# EAGLE board CPU (EAGLE 9.3.2)
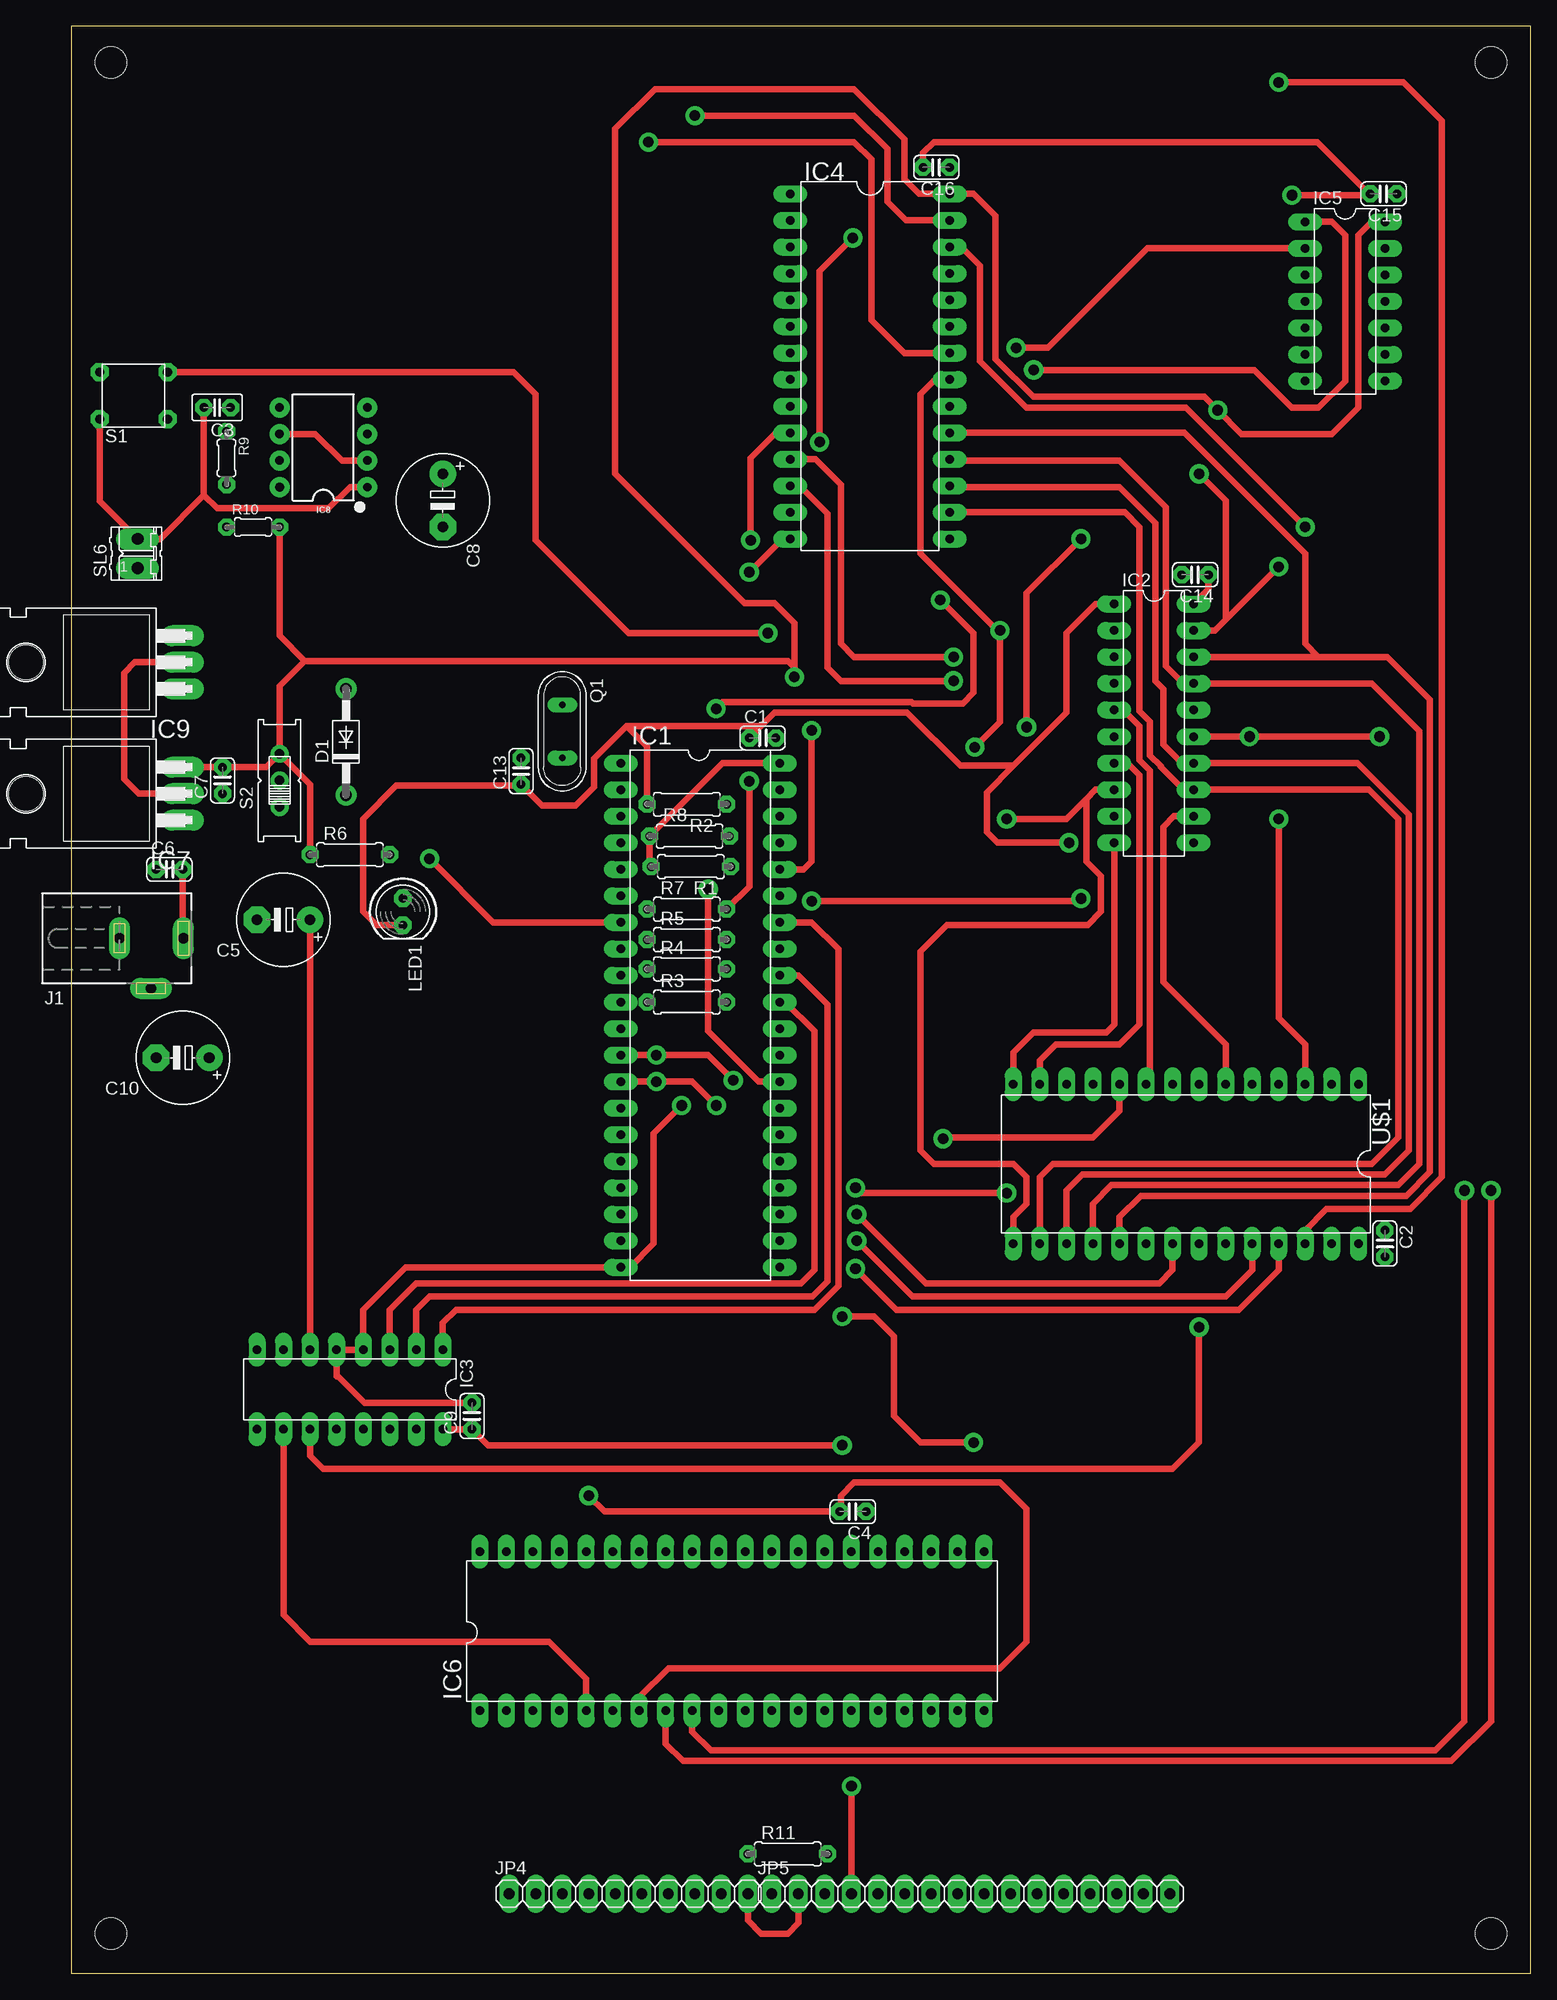
[diagram p0: board, top side]
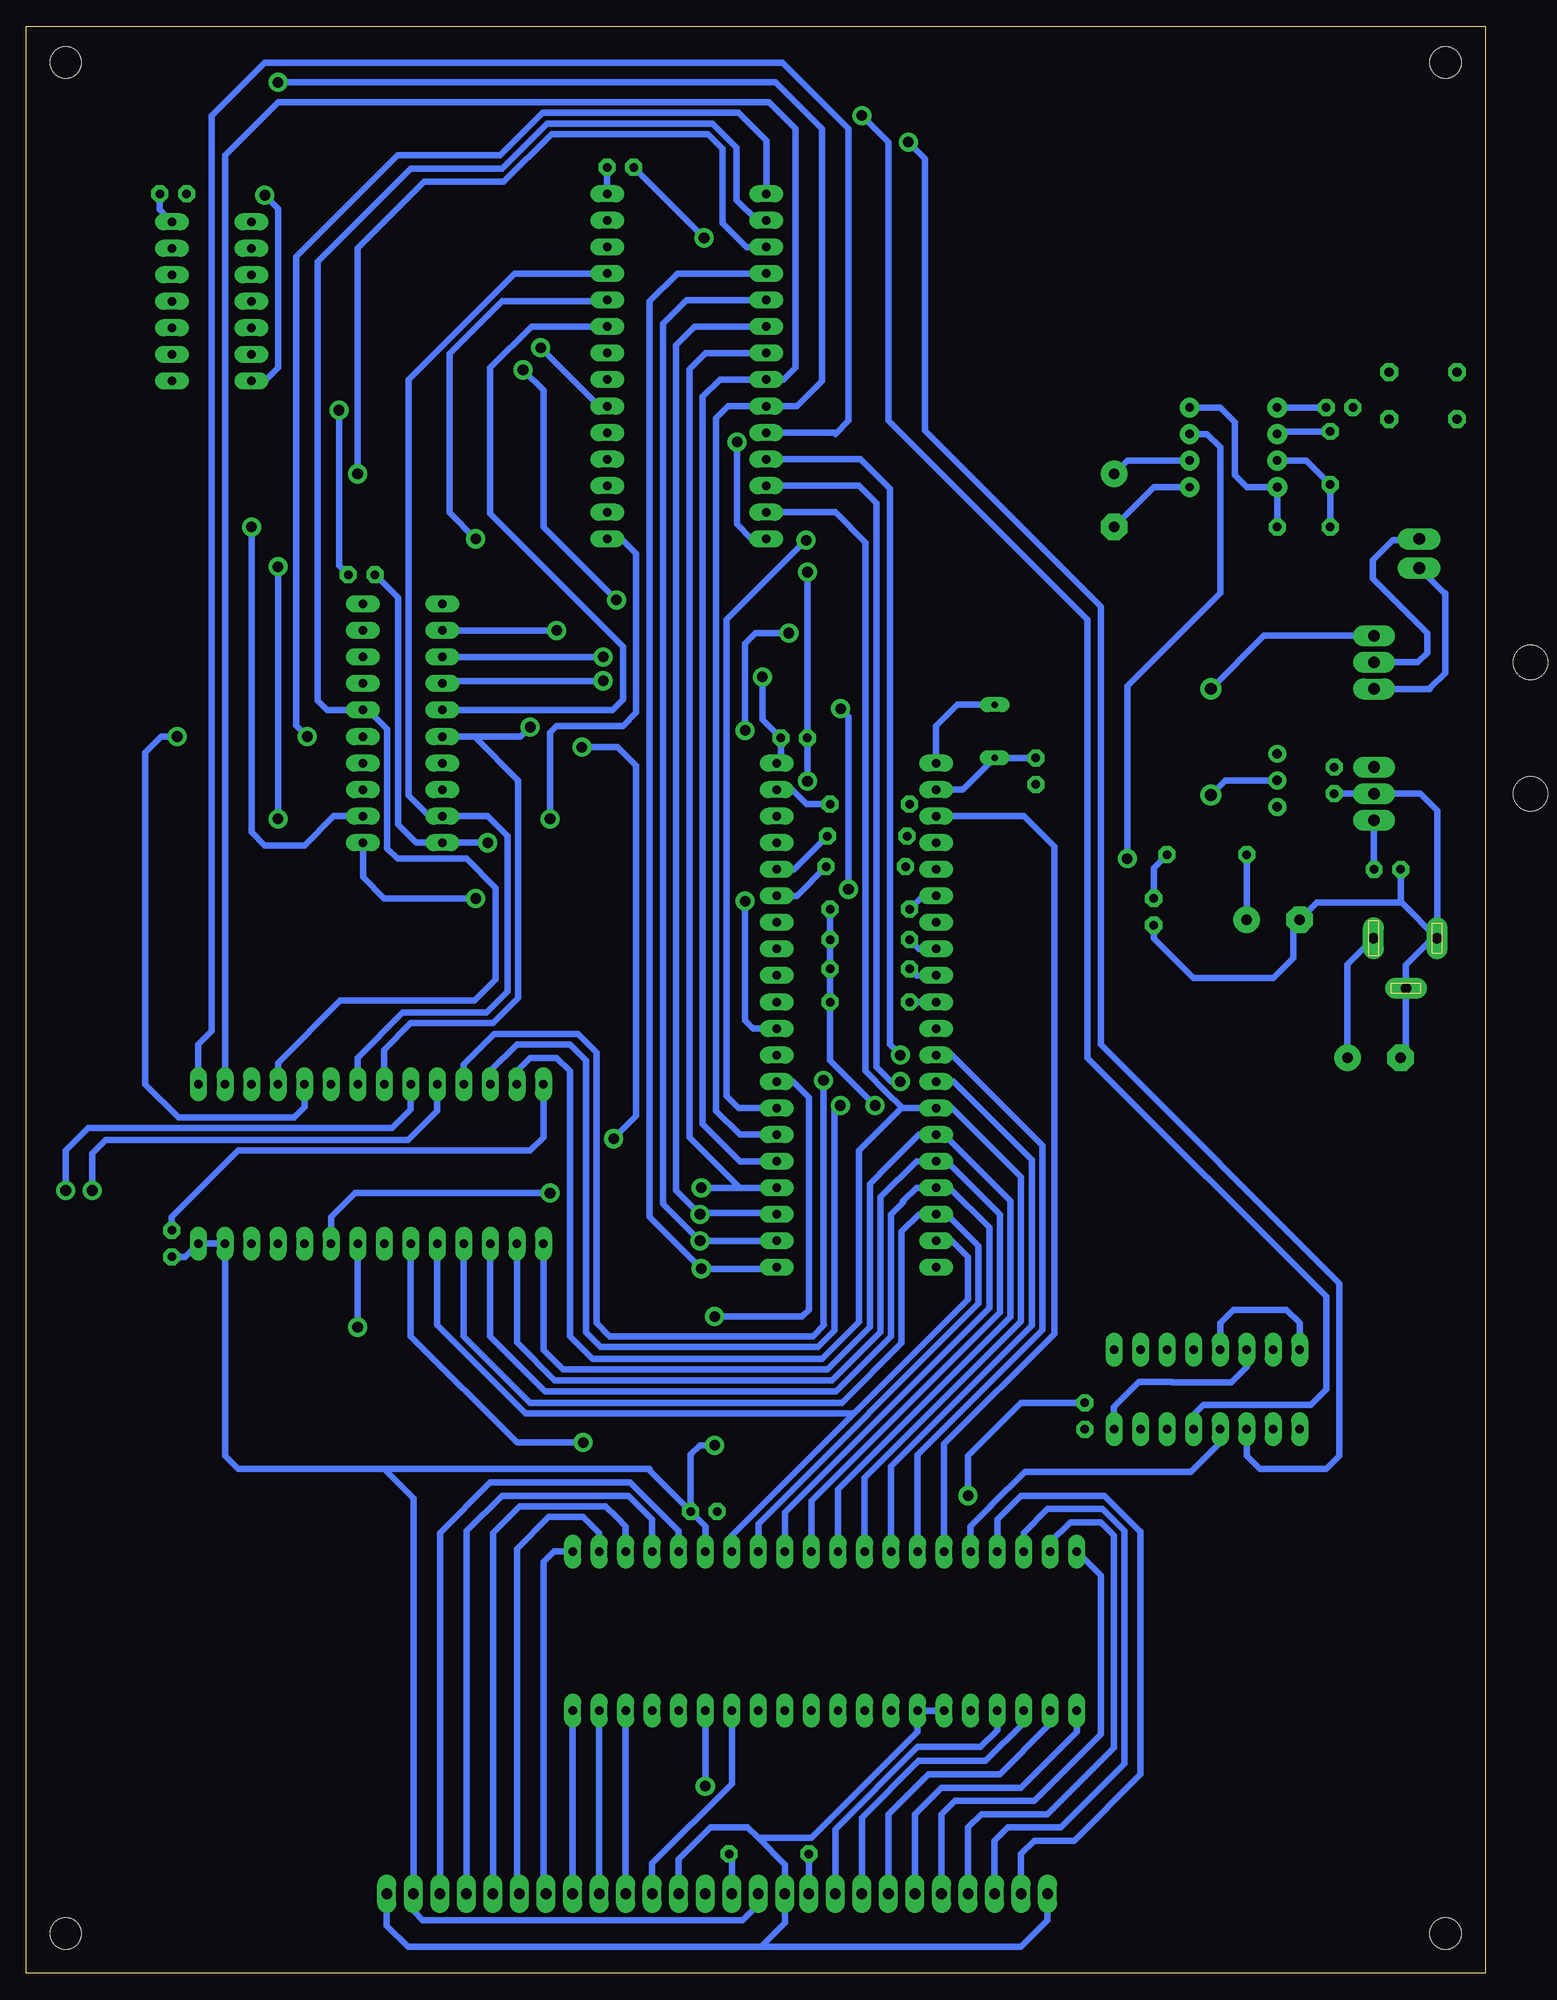
[diagram p1: board, bottom side, seen from below]

Size 139.68 x 186.36 mm. Coordinates in mm from the lower left corner, seen from the top.
Outline: 0,0 139.68,0 139.68,186.36 0,186.36 0,0
Copper layers (1*16): Top 0.035mm / dielectric 1.5mm / Bottom 0.035mm
Design rules "default *": minimum track width 16mil, minimum drill 0.35mm, track to track 16mil, track to pad 16mil, pad to pad 12mil, via to via 6mil, smd to smd 6mil, copper to edge 40mil, drill to drill 6mil, minimum pad ring 16mil, minimum via ring 16mil, stop-mask expansion 4mil, vias tented up to drill 0mil, thermal gap 10mil
Net classes: 0 default: width 0.406 mm, drill 0.254 mm, clearance 0.406 mm; 1 VCC: width 0.61 mm, drill 0.254 mm, clearance 0.254 mm to class 0, clearance 0.406 mm; 2 GND: width 0.61 mm, drill 0.254 mm, clearance 0.254 mm to class 0, clearance 0.406 mm to class 1, clearance 0.406 mm
Holes 3 mm at 3.81,182.88 135.89,182.88 135.89,3.81 3.81,3.81

## Footprints (pad centres in the part's own frame; a part is rotated, then mirrored left to right if it is on the bottom)
C025-024X044 = drill 0.813 octagon: 1 -1.27,0; 2 1.27,0
C2.5-2 = drill 0.813 pad 1.6 octagon: 1 -1.27,0; 2 1.27,0
E5-8,5 = drill 1.016 pad 2.54: + -2.54,0 | drill 1.016 pad 2.54 octagon: - 2.54,0
DO41-10 = drill 1.118 pad 1.93: A 5.08,0; C -5.08,0
DIL40 = drill 0.813 long: 1 -24.13,-7.62; 2 -21.59,-7.62; 3 -19.05,-7.62; 4 -16.51,-7.62; 5 -13.97,-7.62; 6 -11.43,-7.62; 7 -8.89,-7.62; 8 -6.35,-7.62; 9 -3.81,-7.62; 10 -1.27,-7.62; 11 1.27,-7.62; 12 3.81,-7.62; 13 6.35,-7.62; 14 8.89,-7.62; 15 11.43,-7.62; 16 13.97,-7.62; 17 16.51,-7.62; 18 19.05,-7.62; 19 21.59,-7.62; 20 24.13,-7.62; 21 24.13,7.62; 22 21.59,7.62; 23 19.05,7.62; 24 16.51,7.62; 25 13.97,7.62; 26 11.43,7.62; 27 8.89,7.62; 28 6.35,7.62; 29 3.81,7.62; 30 1.27,7.62; 31 -1.27,7.62; 32 -3.81,7.62; 33 -6.35,7.62; 34 -8.89,7.62; 35 -11.43,7.62; 36 -13.97,7.62; 37 -16.51,7.62; 38 -19.05,7.62; 39 -21.59,7.62; 40 -24.13,7.62
DIL20 = drill 0.813 long: 1 -11.43,-3.81; 2 -8.89,-3.81; 3 -6.35,-3.81; 4 -3.81,-3.81; 5 -1.27,-3.81; 6 1.27,-3.81; 7 3.81,-3.81; 8 6.35,-3.81; 9 8.89,-3.81; 10 11.43,-3.81; 11 11.43,3.81; 12 8.89,3.81; 13 6.35,3.81; 14 3.81,3.81; 15 1.27,3.81; 16 -1.27,3.81; 17 -3.81,3.81; 18 -6.35,3.81; 19 -8.89,3.81; 20 -11.43,3.81
DIL16 = drill 0.813 long: 1 -8.89,-3.81; 2 -6.35,-3.81; 3 -3.81,-3.81; 4 -1.27,-3.81; 5 1.27,-3.81; 6 3.81,-3.81; 7 6.35,-3.81; 8 8.89,-3.81; 9 8.89,3.81; 10 6.35,3.81; 11 3.81,3.81; 12 1.27,3.81; 13 -1.27,3.81; 14 -3.81,3.81; 15 -6.35,3.81; 16 -8.89,3.81
DIL28-6 = drill 0.813 long: 1 -16.51,-7.62; 2 -13.97,-7.62; 3 -11.43,-7.62; 4 -8.89,-7.62; 5 -6.35,-7.62; 6 -3.81,-7.62; 7 -1.27,-7.62; 8 1.27,-7.62; 9 3.81,-7.62; 10 6.35,-7.62; 11 8.89,-7.62; 12 11.43,-7.62; 13 13.97,-7.62; 14 16.51,-7.62; 15 16.51,7.62; 16 13.97,7.62; 17 11.43,7.62; 18 8.89,7.62; 19 6.35,7.62; 20 3.81,7.62; 21 1.27,7.62; 22 -1.27,7.62; 23 -3.81,7.62; 24 -6.35,7.62; 25 -8.89,7.62; 26 -11.43,7.62; 27 -13.97,7.62; 28 -16.51,7.62
DIL14 = drill 0.813 long: 1 -7.62,-3.81; 2 -5.08,-3.81; 3 -2.54,-3.81; 4 0,-3.81; 5 2.54,-3.81; 6 5.08,-3.81; 7 7.62,-3.81; 8 7.62,3.81; 9 5.08,3.81; 10 2.54,3.81; 11 0,3.81; 12 -2.54,3.81; 13 -5.08,3.81; 14 -7.62,3.81
TO220H = drill 1.118 long: 1 -2.54,-10.16; 2 0,-10.16; 3 2.54,-10.16 | hole 3.302: 0,4.826
DIP08-KIT = drill 0.813 pad 1.905: 1 -3.81,-4.191; 2 -1.27,-4.191; 3 1.27,-4.191; 4 3.81,-4.191; 5 3.81,4.191; 6 1.27,4.191; 7 -1.27,4.191 | drill 0.864 pad 1.905: 8 -3.81,4.191
DCJ0303 = drill 1 pad 2 long: 1 0,3.1; 2 4.8,0; 3 0,-3
1X10 = drill 1.016 long: 1 -11.43,0; 2 -8.89,0; 3 -6.35,0; 4 -3.81,0; 5 -1.27,0; 6 1.27,0; 7 3.81,0; 8 6.35,0; 9 8.89,0; 10 11.43,0
1X16 = drill 1.016 long: 1 -19.05,0; 2 -16.51,0; 3 -13.97,0; 4 -11.43,0; 5 -8.89,0; 6 -6.35,0; 7 -3.81,0; 8 -1.27,0; 9 1.27,0; 10 3.81,0; 11 6.35,0; 12 8.89,0; 13 11.43,0; 14 13.97,0; 15 16.51,0; 16 19.05,0
LED5MM = drill 0.813 pad 1.676 octagon: A -1.27,0; K 1.27,0
QS = drill 0.61 long: 1 -2.54,0; 2 2.54,0
0207/7 = drill 0.813 octagon: 1 -3.81,0; 2 3.81,0
0204/5 = drill 0.813 octagon: 1 -2.54,0; 2 2.54,0
B3F-10XX = drill 0.889 octagon: COM@1 -3.25,-2.25; COM@2 3.25,-2.25; NO@1 -3.25,2.25; NO@2 3.25,2.25
EG1218 = drill 0.9 pad 1.676: O -2.54,0; P 0,0; S 2.54,0
02P = drill 1.143 long: 1 -1.397,0; 2 1.397,0

## Placement (x,y rotation side)
C1  0.1uF  [C025-024X044]  66.17,118.24 0 top
C2  0.1uF  [C025-024X044]  125.73,69.85 270 top
C3  0.01uF  [C2.5-2]  13.97,149.86 180 top
C4  0.1uF  [C025-024X044]  74.8,44.2 180 top
C5  0.1uF  [E5-8,5]  20.32,100.84 180 top
C6  0.1uF  [C025-024X044]  9.4,105.66 0 top
C7  10uF  [C025-024X044]  14.48,114.17 90 top
C8  47uF  [E5-8,5]  35.56,140.97 270 top
C9  0.1uF  [C025-024X044]  38.35,53.34 90 top
C10  10uF  [E5-8,5]  10.67,87.63 180 top
C13  0.1uF  [C025-024X044]  43.05,115.06 90 top
C14  0.1uF  [C025-024X044]  107.57,133.86 180 top
C15  0.1uF  [C025-024X044]  125.6,170.31 180 top
C16  0.1uF  [C025-024X044]  82.8,172.85 180 top
D1  1N4004  [DO41-10]  26.29,117.86 90 top
IC1  8085  [DIL40]  60.2,91.69 270 top
IC2  74LS373N  [DIL20]  103.63,119.63 270 top
IC3  74LS138N  [DIL16]  26.67,55.88 180 top
IC4  CY62256LL-PC  [DIL28-6]  76.45,153.8 270 top
IC5  74LS04N  [DIL14]  121.92,160.02 270 top
IC6  8255  [DIL40]  63.25,32.77 0 top
IC7  7805T  [TO220H]  0.51,112.9 90 top
IC8  555  [DIP08-KIT]  24.13,146.05 90 top
IC9  7805T  [TO220H]  0.51,125.48 90 top
J1  12v adapter  [DCJ0303]  7.62,99.06 270 top
JP4  [1X10]  53.34,7.62 0 top
JP5  [1X16]  86.11,7.62 0 top
LED1  [LED5MM]  31.75,101.6 270 top
Q1  10MHz  [QS]  46.99,118.87 270 top
R1  10k  [0207/7]  59.31,105.92 180 top
R2  10k  [0207/7]  58.93,111.89 180 top
R3  10k  [0207/7]  58.93,92.96 0 top
R4  10k  [0207/7]  58.93,96.14 0 top
R5  10k  [0207/7]  58.93,98.93 0 top
R6  10k  [0207/7]  26.67,107.06 0 top
R7  10k  [0207/7]  58.93,101.85 0 top
R8  10k  [0207/7]  59.18,108.84 0 top
R9  1M  [0204/5]  14.86,145.03 270 top
R10  10K  [0204/5]  17.4,138.43 0 top
R11  10k  [0207/7]  68.58,11.43 0 top
S1  SPST4B3F-10XX  [B3F-10XX]  5.97,151 0 top
S2  [EG1218]  19.94,114.17 90 top
SL6  9V in  [02P]  6.35,135.89 90 top
U$1  AT28C256  [DIL28-6]  106.68,77.47 180 top

## Library data of the parts
C1 C2 C4 C6 C7 C9 C13-C16 = rcl; SPICEPREFIX: C
C3 = capacitor-wima
C5 C8 C10 R1-R8 R11 = rcl
D1 IC7 IC9 LED1 S2 = adafruit
IC1 = micro-intel; OC_FARNELL: unknown; OC_NEWARK: unknown
IC2 IC3 IC5 = 74xx-eu
IC4 = memory-sram
IC6 = micro-intel; MF: INTERSIL; MPN: IP82C55AZ; OC_FARNELL: 1562050; OC_NEWARK: 79K6939
IC8 = SparkFun-IC-Special-Function; PROD_ID: IC-09173; PROD_ID_ALT: IC-11930
J1 = con-jack; OC_FARNELL: unknown; OC_NEWARK: unknown
JP4 JP5 = pinhead
Q1 = special
R9 R10 = rcl; SPICEPREFIX: R
S1 = bt_electromech
SL6 = CEDT_JANUARY_2015_v5
U$1 = bt_memory

## Nets
A0: IC2.2 IC4.21 IC6.9 U$1.10
A1: IC2.5 IC4.23 IC6.8 U$1.9
A2: IC2.6 IC4.24 U$1.8
A3: IC2.9 IC4.25 U$1.7
A4: IC2.12 IC4.26 U$1.6
A5: IC2.15 IC4.1 U$1.5
A6: IC2.16 IC4.2 U$1.4
A7: IC2.19 IC4.3 U$1.3
A8: IC1.21 IC4.4 U$1.25
A9: IC1.22 IC4.5 U$1.24
A10: IC1.23 IC4.6 U$1.21
A11: IC1.24 IC4.7 U$1.23
A12: IC1.25 IC4.8 U$1.2
A13: IC1.26 IC4.9 U$1.26
A14: IC1.27 IC4.10 U$1.1
A15: IC1.28 IC5.1 U$1.20
CNT: JP5.3 R11.2
D0: IC1.12 IC2.3 IC4.11 IC6.34 U$1.11
D1: IC1.13 IC2.4 IC4.12 IC6.33 U$1.12
D2: IC1.14 IC2.7 IC4.13 IC6.32 U$1.13
D3: IC1.15 IC2.8 IC4.15 IC6.31 U$1.15
D4: IC1.16 IC2.13 IC4.16 IC6.30 U$1.16
D5: IC1.17 IC2.14 IC4.17 IC6.29 U$1.17
D6: IC1.18 IC2.17 IC4.18 IC6.28 U$1.18
D7: IC1.19 IC2.18 IC4.19 IC6.27 U$1.19
EN: IC6.14 JP5.6
ENC0: IC6.37 JP4.2
ENC1: IC6.38 JP4.3
ENC2: IC6.39 JP4.4
ENC3: IC6.40 JP4.5
ENC4: IC6.1 JP4.6
ENC5: IC6.2 JP4.7
ENC6: IC6.3 JP4.8
ENC7: IC6.4 JP4.9
GND [GND]: C1.1 C2.1 C3.2 C4.2 C5.- C6.1 C7.1 C8.- C9.2 C10.- C13.1 C14.2 C15.2 C16.2 IC1.20 IC2.1 IC2.10 IC3.4 IC3.5 IC3.8 IC4.14 IC5.7 IC6.6 IC6.7 IC7.2 IC8.1 IC9.2 J1.2 J1.3 JP4.1 JP5.1 JP5.5 JP5.16 LED1.K R2.2 R3.2 R4.2 R5.2 R7.2 S1.COM@1 SL6.2 U$1.14
I/OR: IC3.10 IC6.5
I/OW: IC3.12 IC6.36
LCD0: IC6.18 JP5.7
LCD1: IC6.19 JP5.8
LCD2: IC6.20 JP5.9
LCD3: IC6.21 JP5.10
LCD4: IC6.22 JP5.11
LCD5: IC6.23 JP5.12
LCD6: IC6.24 JP5.13
LCD7: IC6.25 JP5.14
MEMR: IC3.11 IC4.22 U$1.22
MEMW: IC3.13 IC4.27
N$1: C8.+ IC8.2 IC8.6 R9.1
N$2 [VCC]: C6.2 C10.+ IC7.1 J1.1
N$3: IC1.1 Q1.1
N$4: C13.2 IC1.2 Q1.2
N$5: IC1.35 R1.1
N$6: IC1.39 R2.1
N$7: IC8.7 R9.2 R10.1
N$8: IC1.10 R3.1
N$9: IC1.30 IC2.11
N$10: IC1.9 R4.1
N$11: IC1.8 R5.1
N$12: C3.1 IC8.5
N$13: IC1.6 R7.1
N$14 [VCC]: IC9.1 SL6.1
N$15: IC1.36 R8.2 S1.NO@2
N$16 [VCC]: D1.A IC9.3
N$17 [VCC]: D1.C S2.P
N$18: LED1.A R6.2
N$19: IC4.20 IC5.2
N$25: IC1.34 IC3.1
N$26: IC1.32 IC3.2
N$27: IC1.31 IC3.3
RES_OUT: IC1.3 IC6.35
RS: IC6.15 JP5.4
RST7_5: IC1.7 IC8.3
VCC [VCC]: C1.2 C2.2 C4.1 C5.+ C7.2 C9.1 C14.1 C15.1 C16.1 IC1.40 IC2.20 IC3.6 IC3.16 IC4.28 IC5.14 IC6.26 IC7.3 IC8.4 IC8.8 JP4.10 JP5.2 JP5.15 R1.2 R6.1 R8.1 R10.2 R11.1 S2.S U$1.27 U$1.28

## Tracks (layer width: path | path; a pad name or v marks a point on that pad's centre or on a via)
A0  (via drill 1.02)
  Top 0.61: IC4.21 82.68,152.53 81.28,151.13 81.28,135.89 88.65,128.52 v88.9,128.52 88.9,119.76 v86.49,117.35 | IC6.9 59.44,23.11 61.21,21.34 130.56,21.34 133.35,24.13 v133.35,74.93 | v83.44,79.88 83.57,80.01 97.79,80.01 100.33,82.55 U$1.10
  Bottom 0.61: v83.44,79.88 81.28,82.04 81.28,115.57 83.06,117.35 v86.49,117.35 | U$1.10 100.33,82.55 103.12,79.76 132.08,79.76 133.35,78.49 v133.35,74.93 | IC2.2 v88.9,128.52
A1  (via drill 1.02)
  Top 0.61: IC6.8 56.9,21.97 58.55,20.32 132.08,20.32 135.89,24.13 v135.89,74.93 | U$1.9 103.25,85.47 103.25,115.1 102.23,116.12 102.23,119.38 100.71,120.9 IC2.5
  Bottom 0.61: IC2.5 83.57,120.9 82.55,121.92 82.55,127 95.25,139.7 95.25,153.67 91.31,157.61 IC4.23 | U$1.9 102.87,82.68 104.65,80.9 133.73,80.9 135.89,78.74 v135.89,74.93
A2  (via drill 1.02)
  Top 0.61: v96.65,137.29 91.44,132.08 v91.44,119.28
  Bottom 0.61: IC4.24 84.2,160.02 94.15,160.02 99.14,155.02 99.14,139.78 v96.65,137.29 | U$1.8 105.41,88.39 102.87,90.93 95,90.93 92.58,93.34 92.58,114.17 96.77,118.36 | 96.77,118.36 IC2.6 | v91.44,119.28 92.35,118.36 96.77,118.36
A3
  Bottom 0.61: IC4.25 92.92,162.69 103.07,152.53 103.07,112.72 101.09,110.74 IC2.9 95.5,110.74 93.6,108.84 93.6,93.98 95.63,91.95 103.63,91.95 107.95,87.63 U$1.7
A4  (via drill 1.02)
  Top 0.61: v118.11,138.43 106.68,149.86 91.44,149.86 87,154.31 87,163.45 85.22,165.23 IC4.26 | U$1.6 110.49,88.9 104.52,94.87 104.52,109.73 105.54,110.74 IC2.12
  Bottom 0.61: IC2.12 110.24,110.74 113.03,107.95 116.84,107.95 118.11,109.22 v118.11,138.43
A5  (via drill 1.02)
  Top 0.61: IC2.15 v112.78,118.36 v125.22,118.36
  Bottom 0.61: U$1.5 113.03,82.93 114.05,81.92 125.09,81.92 128.27,85.09 128.27,116.84 126.75,118.36 v125.22,118.36 | v112.78,118.36 113.83,119.42 113.83,164.3 104.14,173.99 94.31,173.99 90.25,178.05 71.5,178.05 68.83,175.39 IC4.1
A6
  Bottom 0.61: U$1.4 115.57,87.12 109.6,93.09 96.77,93.09 94.74,95.12 94.74,103.89 97.54,106.68 104.14,106.68 105.1,107.64 105.1,119.08 106.93,120.9 IC2.16 110.87,120.9 111.76,121.79 111.76,163.83 102.87,172.72 94.15,172.72 89.83,177.04 74,177.04 71.67,174.71 71.67,169.72 69.72,167.77 IC4.2
A7  (via drill 1.02)
  Top 0.61: v115.57,110.49 115.57,91.44 118.11,88.9 U$1.3 | IC2.19 109.47,128.52 110.49,129.54 | 110.49,129.54 v115.57,134.62 | v107.95,143.51 110.49,140.97 110.49,129.54
  Bottom 0.61: IC4.3 70.74,165.23 73.03,167.51 73.03,174.62 74.42,176.02 89.41,176.02 93.98,171.45 101.6,171.45 107.95,165.1 v107.95,143.51 | v115.57,110.49 v115.57,134.62
A8  (via drill 1.02)
  Top 0.61: U$1.25 115.57,67.31 111.76,63.5 78.99,63.5 v75.06,67.44
  Bottom 0.61: IC1.21 67.94,67.44 v75.06,67.44 80.01,72.39 80.01,160.02 77.34,162.69 IC4.4
A9  (via drill 1.02)
  Top 0.61: U$1.24 113.03,67.31 110.49,64.77 80.52,64.77 v75.18,70.1
  Bottom 0.61: IC1.22 v75.18,70.1 78.74,73.66 78.74,157.86 76.45,160.15 IC4.5
A10  (via drill 1.02)
  Top 0.61: U$1.21 105.41,67.31 104.14,66.04 81.79,66.04 v75.18,72.64
  Bottom 0.61: IC1.23 67.94,72.77 75.06,72.77 v75.18,72.64 77.47,74.93 77.47,155.83 75.69,157.61 IC4.6
A11  (via drill 1.02)
  Top 0.61: v89.53,74.68 75.56,74.68 v75.06,75.18
  Bottom 0.61: IC4.7 74.68,155.07 76.2,153.54 76.2,80.01 71.37,75.18 | U$1.23 110.49,72.39 108.2,74.68 v89.53,74.68 | 71.37,75.18 IC1.24 | 71.37,75.18 v75.06,75.18
A12
  Bottom 0.61: IC1.25 71.37,77.72 74.93,81.28 74.93,150.88 73.28,152.53 IC4.8 67.18,152.53 66.04,153.67 66.04,176.53 68.58,179.07 115.57,179.07 120.65,173.99 U$1.2
A13  (via drill 1.02)
  Top 0.61: U$1.26 118.11,71.12 120.14,73.15 128.14,73.15 131.19,76.2 131.19,177.29 127.51,180.97 v115.57,180.97
  Bottom 0.61: IC1.26 71.37,80.26 73.66,82.55 73.66,148.84 72.52,149.99 IC4.9 65.91,149.99 63.5,152.4 63.5,176.53 67.94,180.97 v115.57,180.97
A14  (via drill 1.02)
  Top 0.61: v65.02,137.16 65.02,145.03 67.44,147.45 IC4.10
  Bottom 0.61: IC1.27 71.5,82.8 72.64,83.95 72.64,129.54 v65.02,137.16 | IC4.10 62.36,147.45 62.23,147.32 60.96,148.59 60.96,176.53 67.31,182.88 116.84,182.88 121.92,177.8 121.92,90.17 123.19,88.9 U$1.1
A15  (via drill 1.02)
  Top 0.61: v86.36,50.8 81.28,50.8 78.74,53.34 78.74,60.96 76.84,62.87 v73.79,62.87 | IC1.28 65.79,85.34 60.96,90.17 v60.96,103.74 v60.97,103.75 | IC5.1 120.65,167.64 121.92,166.37 121.92,152.4 119.38,149.86 116.84,149.86 113.25,153.45 v92.11,153.45 | v83.19,131.44 86.36,128.27 86.36,122.56 85.34,121.54 80.56,121.54 80.43,121.67 62.36,121.67 v61.72,121.03
  Bottom 0.61: v86.36,50.8 92.71,50.8 102.87,60.96 U$1.20 | IC1.28 66.29,85.34 64.77,83.82 64.77,63.5 65.41,62.87 v73.79,62.87 | v92.11,153.45 90.17,151.51 90.17,138.43 v83.19,131.44 | v61.72,121.03 60.97,120.28 v60.97,103.75
CNT
  Bottom 0.61: JP5.3 72.14,11.18 R11.2
D0  (via drill 1.02)
  Top 0.61: IC4.11 71.25,144.91 73.66,142.49 73.66,127.25 74.93,125.98 v84.45,125.98 | IC1.12 v56.01,87.88 60.96,87.88 63.37,85.48 v63.37,85.47
  Bottom 0.61: IC6.34 54.36,49.63 42.42,61.57 42.42,79.25 51.05,87.88 IC1.12 | IC4.11 59.82,144.91 57.02,142.11 57.02,88.9 v56.01,87.88 | IC2.3 v84.45,125.98 | U$1.11 97.79,87 94.87,89.92 86.87,89.92 85.09,88.14 85.09,62.23 83.82,60.96 64.39,60.96 63.31,62.04 63.37,62.1 63.37,83.82 63.37,83.83 v63.37,85.47
D1  (via drill 1.02)
  Top 0.61: IC4.12 69.72,142.37 72.39,139.7 72.39,124.97 73.66,123.7 v84.45,123.7 | IC1.13 v56.01,85.34 59.44,85.34 61.72,83.06 v61.75,83.06
  Bottom 0.61: IC6.33 56.9,48.51 55.88,49.53 55.88,49.55 43.43,61.99 43.43,77.85 50.93,85.34 IC1.13 | IC4.12 59.94,142.37 58.29,140.72 58.29,86.74 56.9,85.34 v56.01,85.34 | IC2.4 99.57,123.7 v84.45,123.7 | U$1.12 95.25,86.36 92.71,88.9 87.63,88.9 86.11,87.38 86.11,61.34 84.71,59.94 63.88,59.94 62.29,61.53 62.29,82.55 62.26,82.55 v61.75,83.06
D2
  Top 0.61: U$1.13 92.71,87.38 94.23,88.9 100.33,88.9 102.23,90.81 102.23,114.68 101.09,115.82 IC2.7
  Bottom 0.61: IC6.32 59.44,47.43 44.45,62.41 44.45,76.2 51.05,82.8 IC1.14 55.88,82.8 | IC4.13 62.23,139.83 59.34,136.94 59.34,86.36 59.31,86.33 59.31,86.32 57.32,84.33 57.31,84.33 55.88,82.9 55.88,82.8 | U$1.13 92.71,86.36 91.44,87.63 88.9,87.63 87.63,86.36 87.63,60.96 85.47,58.8 63.5,58.8 59.94,62.36 59.94,78.74 55.88,82.8
D3  (via drill 1.02)
  Top 0.61: U$1.15 90.17,72.39 91.44,73.66 91.44,76.2 90.17,77.47 82.55,77.47 81.28,78.74 81.28,97.79 83.82,100.33 97.28,100.33 98.55,101.6 98.55,105.03 97.16,106.43 97.16,112.39 | IC2.8 98.04,113.28 97.16,112.39 | 97.16,112.39 95.25,110.49 v89.53,110.49
  Bottom 0.61: IC6.31 61.98,46.32 45.47,62.83 45.47,73.91 51.82,80.26 IC1.15 54.23,80.26 57.09,77.41 58.93,75.56 58.93,61.85 62.99,57.78 88.26,57.78 90.17,59.69 U$1.15 | IC4.15 82.68,137.29 81.28,135.89 81.28,120.65 82.55,119.38 88.9,119.38 89.53,118.75 v89.53,110.49
D4
  Top 0.61: IC4.16 100.84,139.83 102.23,138.43 102.23,120.82 103.25,119.8 103.25,116.54 104.27,115.52 104.27,115.44 106.43,113.28 IC2.13 124.21,113.28 127,110.49 127,80.01 124.46,77.47 93.98,77.47 92.71,76.2 U$1.16
  Bottom 0.61: IC6.30 64.52,45.22 46.48,63.25 46.48,72.64 51.56,77.72 IC1.16 54.48,77.72 57.91,74.3 57.91,61.39 62.53,56.77 89.11,56.77 92.71,60.37 U$1.16
D5
  Top 0.61: IC4.17 84.2,142.24 100.33,142.24 103.76,138.81 103.76,123.7 104.52,122.94 104.52,117.6 106.3,115.82 IC2.14 123.1,115.82 128.02,110.91 128.02,78.74 125.73,76.45 96.77,76.45 95.25,74.93 U$1.17
  Bottom 0.61: IC6.29 67.06,44.12 47.5,63.67 47.5,71.37 51.31,75.18 IC1.17 54.48,75.18 55.75,73.91 55.75,73.79 56.9,72.64 56.9,60.96 57.14,60.71 57.15,60.71 62.15,55.71 90,55.71 95.25,60.96 U$1.17
D6
  Top 0.61: IC4.18 84.2,144.78 100.33,144.78 104.77,140.34 104.77,125.09 106.43,123.44 IC2.17 124.46,123.44 129.03,118.87 129.03,77.47 127,75.44 99.57,75.44 97.79,73.66 U$1.18
  Bottom 0.61: IC6.28 69.6,43.01 48.51,64.09 48.51,69.6 51.56,72.64 IC1.18 54.23,72.64 55.88,70.99 55.88,60.33 61.59,54.61 91.44,54.61 97.79,60.96 U$1.18
D7
  Top 0.61: IC4.19 106.55,147.45 118.11,135.89 118.11,127.25 119.38,125.98 | IC2.18 119.38,125.98 | 119.38,125.98 125.98,125.98 130.05,121.92 130.05,76.71 127.76,74.42 102.36,74.42 100.33,72.39 U$1.19
  Bottom 0.61: IC6.27 72.14,41.91 60.45,53.59 | 60.45,53.59 49.53,64.52 49.53,68.58 51.05,70.1 IC1.19 | 60.45,53.59 91.86,53.59 100.33,62.06 U$1.19
EN
  Bottom 0.61: JP5.6 79.76,10.54 72.14,18.16 72.14,19.05 72.14,20.07 IC6.14
ENC0
  Bottom 0.61: JP4.2 44.45,11.43 43.18,12.7 39.37,12.7 33.02,19.05 33.02,42.29 33.07,42.29 36.5,45.72 44.45,45.72 46.74,43.43 IC6.37
ENC1
  Bottom 0.61: JP4.3 46.99,12.7 45.72,13.97 40.64,13.97 34.54,20.07 34.54,42.33 36.66,44.45 41.91,44.45 44.2,42.16 IC6.38
ENC2
  Bottom 0.61: JP4.4 49.53,13.97 48.26,15.24 41.91,15.24 35.56,21.59 35.56,41.91 36.83,43.18 39.75,43.18 41.66,41.27 IC6.39
ENC3
  Bottom 0.61: JP4.5 52.07,15.24 50.8,16.51 43.18,16.51 36.83,22.86 36.83,38.1 IC6.40
ENC4
  Bottom 0.61: IC6.1 39.12,23.11 44.45,17.78 52.07,17.78 54.61,15.24 JP4.6
ENC5
  Bottom 0.61: IC6.2 41.91,24.89 41.91,23.62 46.48,19.05 53.34,19.05 57.15,15.24 JP4.7
ENC6
  Bottom 0.61: IC6.3 44.2,24 47.88,20.32 54.28,20.32 59.69,14.91 JP4.8
ENC7
  Bottom 0.61: IC6.4 46.74,23.28 48.34,21.67 54.36,21.67 62.23,13.8 JP4.9
GND  (via drill 1.02)
  Top 0.61: U$1.14 90.17,88.14 92.07,90.04 99.06,90.04 99.82,90.81 IC2.10 | 90.17,115.57 85.09,115.57 80.01,120.65 67.31,120.65 66.04,119.38 | IC2.1 98.04,131.06 95.25,128.27 95.25,120.65 90.17,115.57 | IC4.14 68.07,137.29 v64.9,134.11 | C15.2 124.33,170.18 | C16.2 81.53,174.24 82.55,175.26 119.25,175.26 124.33,170.18 | R7.2 64.9,104.01 v64.9,114.1 | v116.84,170.18 124.33,170.18 | IC7.2 6.48,112.9 5.08,114.3 5.08,124.46 6.1,125.48 IC9.2 | 12.7,141.48 13.97,140.21 24.64,140.21 26.67,142.24 IC8.1 | C3.2 12.7,141.48 | C9.2 28.07,54.61 25.53,57.15 25.4,57.15 IC3.5 IC3.4 27.94,63.5 32,67.56 IC1.20 53.47,67.56 55.75,69.85 55.75,80.39 v58.42,83.06 | 53.17,119.38 50.04,116.25 50.04,113.54 48.26,111.76 45.09,111.76 C13.1 42.93,113.67 31.12,113.67 27.94,110.49 27.94,101.6 29.21,100.33 LED1.K | v49.53,45.72 51.05,44.2 C4.2 73.66,44.32 73.66,45.72 74.93,46.99 88.9,46.99 91.44,44.45 91.44,31.75 88.9,29.21 57.15,29.21 54.36,26.42 IC6.7 | v71.63,146.56 71.63,162.92 v74.8,166.09 | 90.17,115.57 87.63,113.03 87.63,109.22 88.65,108.2 v95.5,108.2 | 12.7,141.48 8.51,137.29 SL6.2 2.72,140.92 S1.COM@1 | C1.1 66.04,119.38 | 66.04,119.38 53.17,119.38 | R2.2 55.12,117.43 53.17,119.38
  Bottom 0.61: JP4.1 41.91,5.08 44.45,2.54 69.34,2.54 | JP5.5 77.22,10.92 74.17,13.97 70.61,13.97 69.6,12.95 | R7.2 R5.2 R4.2 R3.2 62.74,87.38 v58.42,83.06 | C2.1 125.73,72.39 119.38,78.74 91.44,78.74 90.17,80.01 U$1.14 | IC5.7 116.84,152.4 115.57,153.67 115.57,168.91 v116.84,170.18 | SL6.2 6.48,137.16 8.89,137.16 10.79,135.25 10.79,133.48 5.59,128.27 5.59,126.36 6.48,125.48 IC9.2 | C10.- 7.62,88.14 J1.2 7.62,96.52 5.08,99.06 J1.3 | J1.3 8.02,102.47 | 8.02,102.47 8.13,102.57 C6.1 | J1.3 4.62,111.3 6.22,112.9 IC7.2 C7.1 | IC8.1 31.75,142.24 C8.- | 8.02,102.47 16.15,102.47 C5.- 18.41,100.2 18.41,97.16 20.32,95.25 27.94,95.25 31.75,99.06 LED1.K | IC3.8 17.78,62.23 19.05,63.5 24.13,63.5 25.4,62.23 IC3.5 | v49.53,45.72 49.53,49.53 44.45,54.61 C9.2 | 69.34,2.54 67.06,4.83 JP5.1 67.06,10.41 69.6,12.95 | JP5.16 105.16,4.57 103.12,2.54 69.34,2.54 | IC6.6 IC6.7 54.36,23.11 64.52,12.95 69.6,12.95 | C16.2 74.8,166.12 v74.8,166.09 | v71.63,146.56 71.63,138.68 70.23,137.29 IC4.14 | C14.2 104.09,131.65 104.09,109.93 102.36,108.2 IC2.10 v95.5,108.2 | v64.9,134.11 C1.1 v64.9,114.1
I/OR
  Top 0.61: IC6.5 49.28,28.19 45.72,31.75 22.86,31.75 20.32,34.29 IC3.10
I/OW
  Bottom 0.61: IC6.36 49.28,42.8 47.32,44.75 47.32,44.77 44.09,48.01 28.19,48.01 25.4,50.8 IC3.12
LCD0
  Bottom 0.61: JP5.7 IC6.18
LCD1
  Bottom 0.61: JP5.8 IC6.19
LCD2
  Bottom 0.61: JP5.9 IC6.20
LCD3
  Bottom 0.61: IC6.21 89.15,40.39 90.17,39.37 90.17,7.87 JP5.10
LCD4
  Bottom 0.61: JP5.11 92.71,7.87 92.71,40.64 89.66,43.69 86.36,43.69 84.84,42.16 IC6.22
LCD5
  Bottom 0.61: JP5.12 95,42.16 92.46,44.7 84.2,44.7 83.19,43.69 82.3,42.8 IC6.23
LCD6
  Bottom 0.61: JP5.13 97.54,42.33 94.15,45.72 82.04,45.72 79.76,43.43 IC6.24
LCD7
  Bottom 0.61: JP5.14 100.08,42.16 95.25,46.99 81.88,46.99 77.22,42.33 IC6.25
MEMR  (via drill 1.02)
  Top 0.61: v107.95,61.85 107.95,50.8 105.41,48.26 24.13,48.26 22.86,49.53 IC3.11 | IC4.22 79.76,155.07 77.47,157.35 76.58,158.24 76.58,173.61 74.93,175.26 v55.24,175.26
  Bottom 0.61: v107.95,61.85 U$1.22 | IC3.11 22.86,49.53 21.59,48.26 15.24,48.26 13.97,49.53 13.97,66.04 36.83,88.9 36.83,130.81 53.66,147.64 53.66,173.67 v55.24,175.26
MEMW  (via drill 1.02)
  Top 0.61: v59.69,177.8 74.93,177.8 78.1,174.62 78.1,169.54 79.88,167.77 IC4.27
  Bottom 0.61: IC3.13 27.94,53.47 27,54.41 16.71,54.41 15.24,55.88 15.24,64.77 38.1,87.63 38.1,129.54 57.15,148.59 57.15,175.26 v59.69,177.8
N$1
  Top 0.61: IC8.2 25.91,144.78 23.37,147.32 IC8.6
  Bottom 0.61: IC8.6 19.68,147.57 R9.1 | C8.+ 34.29,144.78 IC8.2
N$2
  Top 0.61: C6.2 10.67,99.11 J1.1
  Bottom 0.61: J1.1 13.21,96.57 C10.+ | IC7.1 C6.2
N$3
  Bottom 0.61: IC1.1 52.58,119.38 50.55,121.41 Q1.1
N$4
  Bottom 0.61: IC1.2 50.04,113.28 Q1.2 C13.2
N$5
  Bottom 0.61: R1.1 65.91,103.12 IC1.35
N$6
  Bottom 0.61: IC1.39 66.38,113.28 64.99,111.89 R2.1
N$7
  Bottom 0.61: R10.1 R9.2 17.14,144.78 IC8.7
N$8
  Bottom 0.61: IC1.10 R3.1
N$9  (via drill 1.02)
  Top 0.61: v96.65,102.87 96.39,102.62 v70.87,102.62
  Bottom 0.61: v96.65,102.87 105.41,102.87 107.44,104.9 IC2.11 | v70.87,102.62 70.87,91.19 70.1,90.42 IC1.30
N$10
  Bottom 0.61: IC1.9 54.48,95.5 R4.1
N$11
  Bottom 0.61: IC1.8 54.23,98.04 R5.1
N$12
  Bottom 0.61: C3.1 IC8.5
N$13
  Bottom 0.61: IC1.6 53.85,103.12 R7.1
N$14
  Bottom 0.61: SL6.1 3.94,132.08 3.86,132.08 3.86,124.46 5.33,122.99 5.33,122.94 IC9.1
N$15  (via drill 1.02)
  Top 0.61: IC1.36 70.1,105.66 70.87,106.43 v70.87,118.95 | v66.67,128.27 53.34,128.27 44.45,137.16 44.45,151.13 42.33,153.25 S1.NO@2
  Bottom 0.61: R8.2 66.17,105.66 IC1.36 | v66.67,128.27 69.85,128.27 70.87,127.25 v70.87,118.95
N$16
  Bottom 0.61: IC9.3 21.21,128.02 D1.A
N$17
  Bottom 0.61: S2.P 24.89,114.17 D1.C
N$18
  Bottom 0.61: R6.2 31.75,105.79 LED1.A
N$19  (via drill 1.02)
  Top 0.61: IC5.2 103,165.1 93.47,155.57 v90.42,155.57
  Bottom 0.61: v90.42,155.57 84.84,149.99 IC4.20
N$25
  Top 0.61: IC3.1 35.56,62.23 36.83,63.5 71.12,63.5 73.43,65.81 73.43,98.02 70.87,100.58 IC1.34
N$26
  Top 0.61: IC3.2 33.02,63.5 34.29,64.77 70.95,64.77 72.39,66.21 72.39,92.71 69.6,95.5 IC1.32
N$27
  Top 0.61: IC1.31 68.33,92.96 71.12,90.17 71.12,67.31 69.85,66.04 33.02,66.04 30.48,63.5 IC3.3
RES_OUT
  Bottom 0.61: IC6.35 51.82,50.67 41.27,61.21 41.27,107.82 44.2,110.74 IC1.3
RS  (via drill 1.02)
  Top 0.61: v74.68,17.91 JP5.4
  Bottom 0.61: IC6.15 74.68,17.78 74.68,17.79 v74.68,17.91
RST7_5  (via drill 1.02)
  Top 0.61: v34.29,106.68 40.39,100.58 IC1.7
  Bottom 0.61: IC8.3 26.67,147.32 25.4,146.05 25.4,132.08 34.29,123.19 v34.29,106.68
VCC  (via drill 1.02)
  Top 0.61: IC2.20 108.84,132.46 C14.1 | R1.2 55.37,106.05 R8.1 62.36,115.82 IC1.40 | 22.35,125.6 68.58,125.6 69.22,124.97 v69.22,124.08 69.22,129.22 67.31,131.13 64.45,131.13 52.07,143.51 52.07,176.53 55.88,180.34 74.93,180.34 79.76,175.51 79.76,171.7 81.15,170.31 IC4.28 86.36,170.31 88.45,168.21 88.45,154.5 92.07,150.88 108.46,150.88 v109.73,149.61 112.01,147.32 120.65,147.32 123.19,149.86 123.19,166.37 124.46,167.64 IC5.14 | S2.S 19.94,123.19 22.35,125.6 | IC7.3 C7.2 18.67,115.44 S2.S | R6.1 22.86,113.79 S2.S | IC3.6 C5.+ | v73.79,50.55 39.88,50.55 C9.1 IC3.16 | JP4.10 64.77,5.08 66.04,3.81 68.58,3.81 69.6,4.83 JP5.2 | R10.2 19.94,128.02 22.35,125.6
  Bottom 0.61: R11.1 JP4.10 | JP5.2 69.6,6.6 71.12,5.08 101.73,5.08 102.62,5.97 JP5.15 102.62,45.47 105.41,48.26 | C4.1 74.68,42.8 IC6.26 | IC1.40 67.44,116.2 C1.2 69.22,120.02 v69.22,124.08 | C2.2 124.46,68.58 U$1.28 U$1.27 120.65,49.53 119.38,48.26 105.41,48.26 | C16.1 IC4.28 | C4.1 80.01,48.13 80.01,48.26 105.41,48.26 | C14.1 109.73,134.75 v109.73,149.61 | C4.1 76.07,49.66 75.18,50.55 v73.79,50.55 | C15.1 126.87,168.78 IC5.14 | R10.2 IC8.8 22.86,142.24 24,143.38 24,148.46 25.4,149.86 IC8.4 | IC3.16 35.56,54.23 33.2,56.59 30,56.59 29.98,56.58 24.32,56.58 22.86,58.04 IC3.6 | C5.+ R6.1

## Text on the board
Name: WORLD CLOCK | ANMOL GULATI | 2017UEC2195 | SANYAM JAIN | 2017UEC3182